# Altium PCB PCB1.PcbDoc
Units mm, origin at the board's own origin, x right, y up, seen from the top; angles counter-clockwise.
Board outline 51.56 x 39.8 mm, 2 copper layers (Top Layer, Bottom Layer); 26 components, 16 nets, 89 pads, 12 vias.
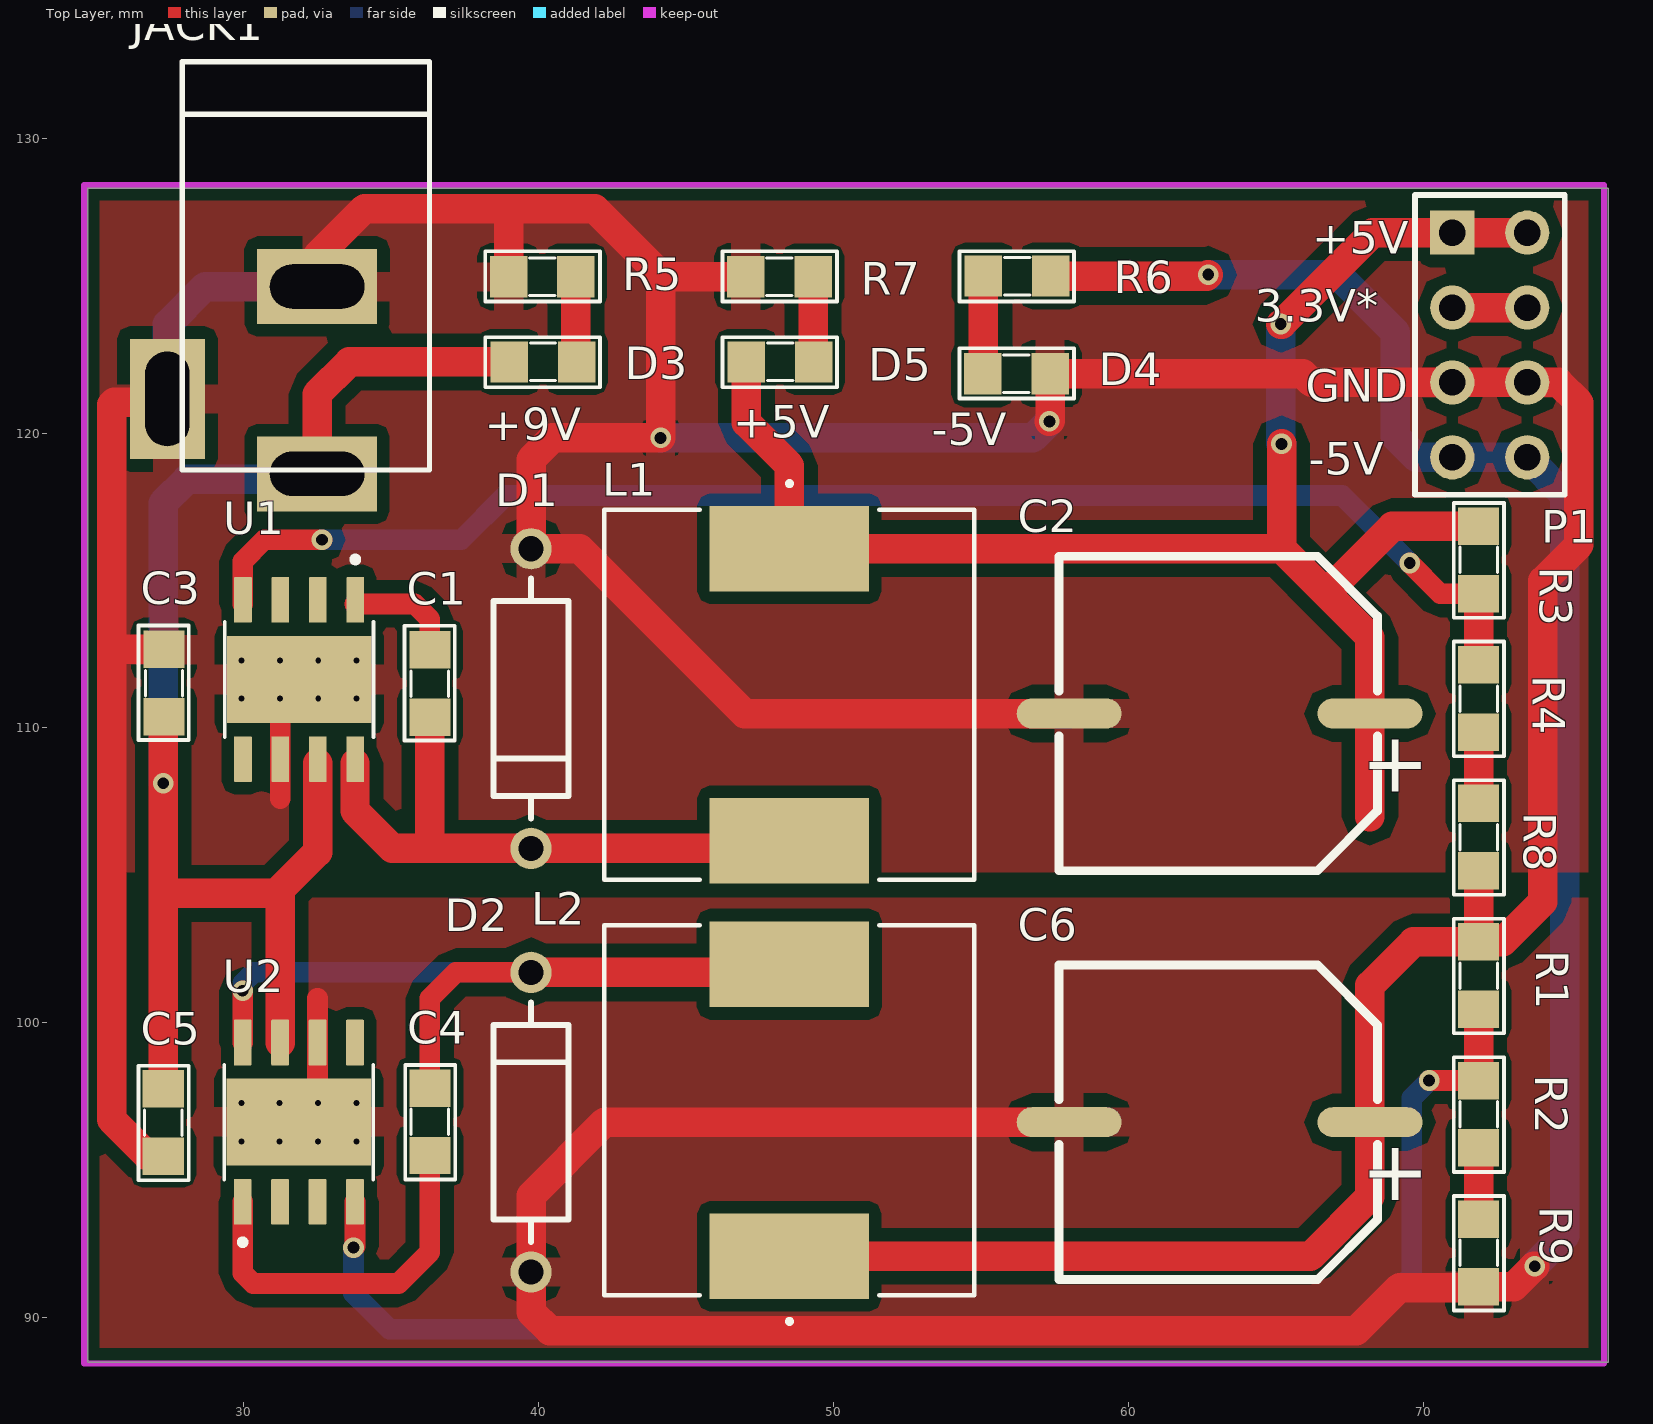
[diagram p0: Top Layer view]
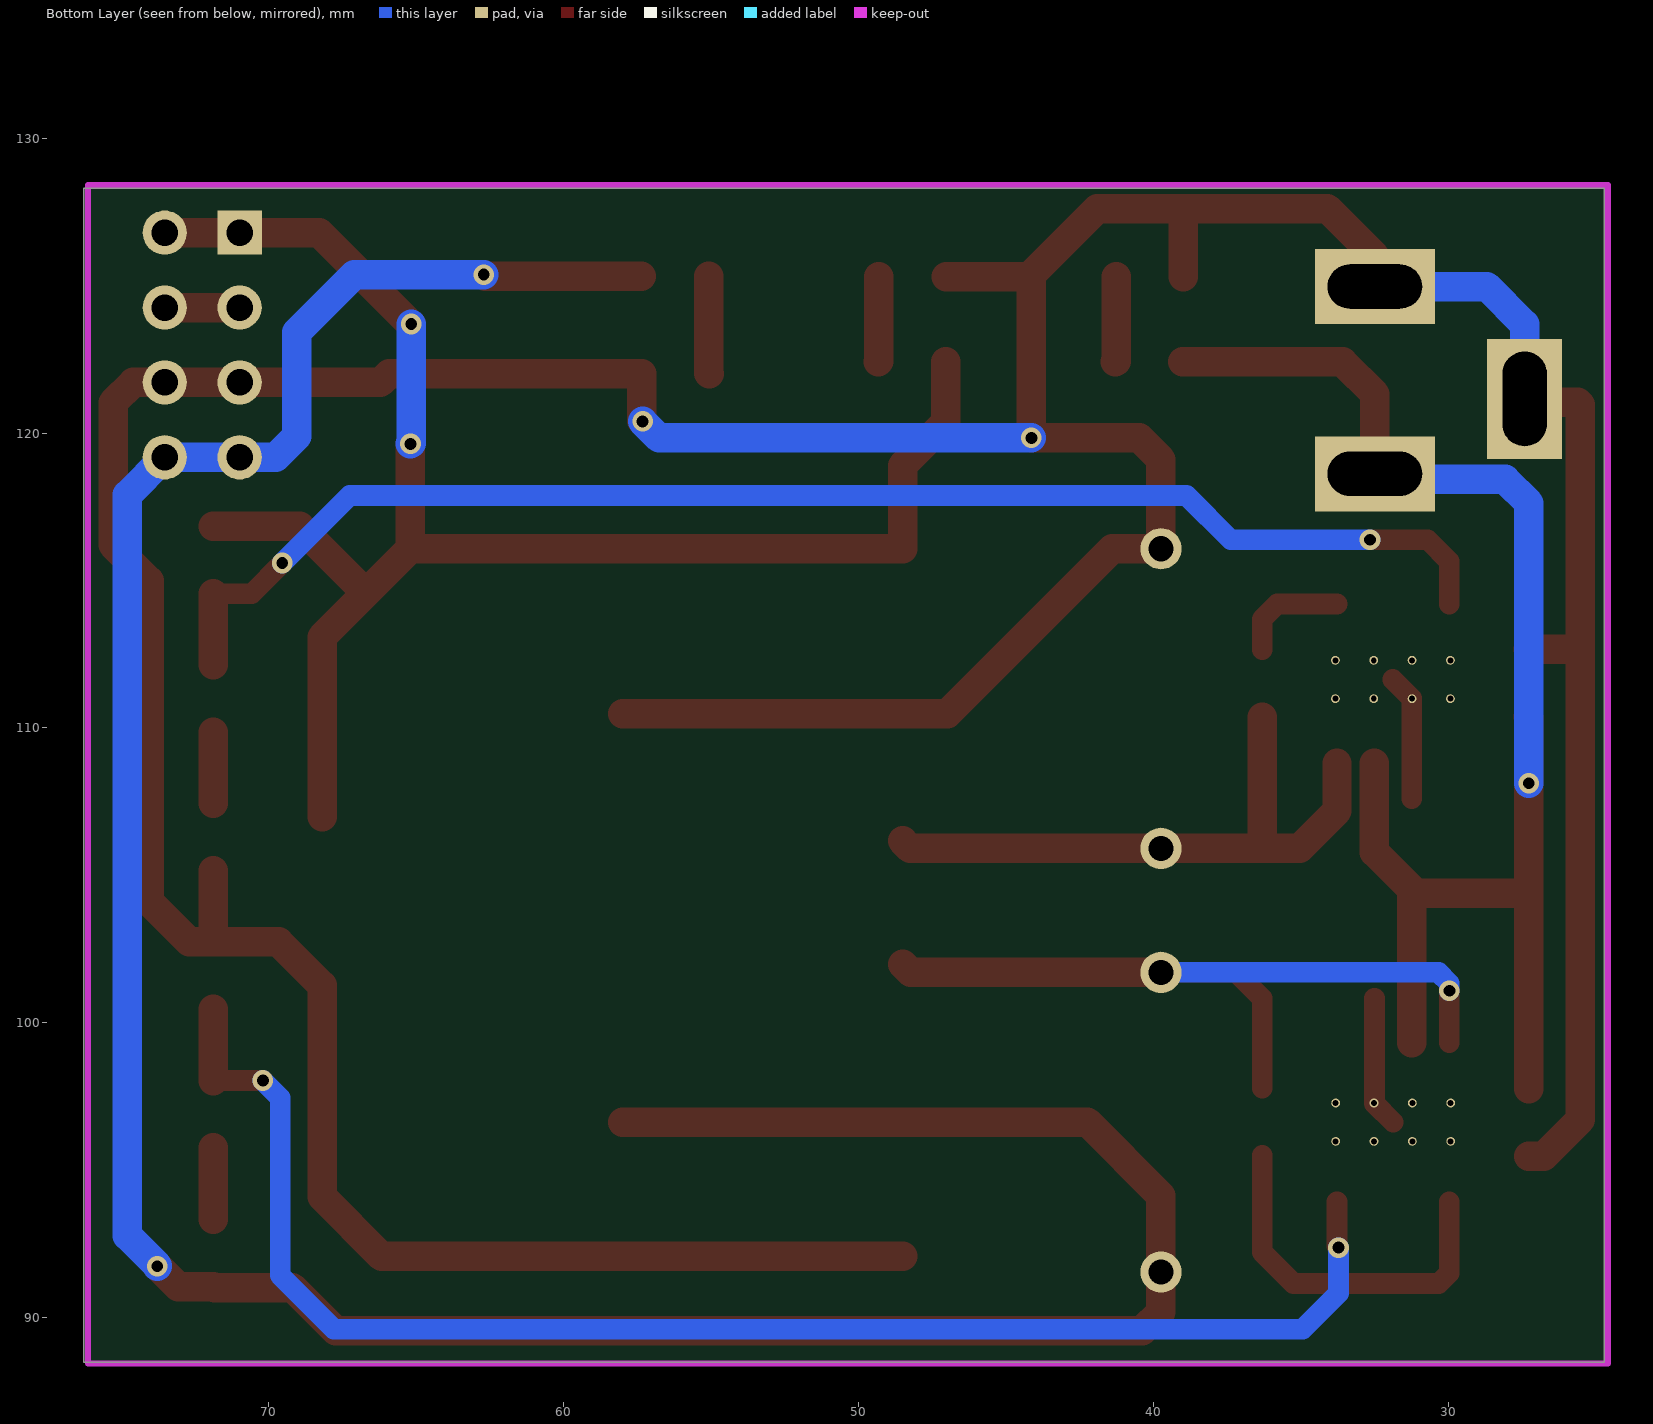
[diagram p1: Bottom Layer view, seen from below]
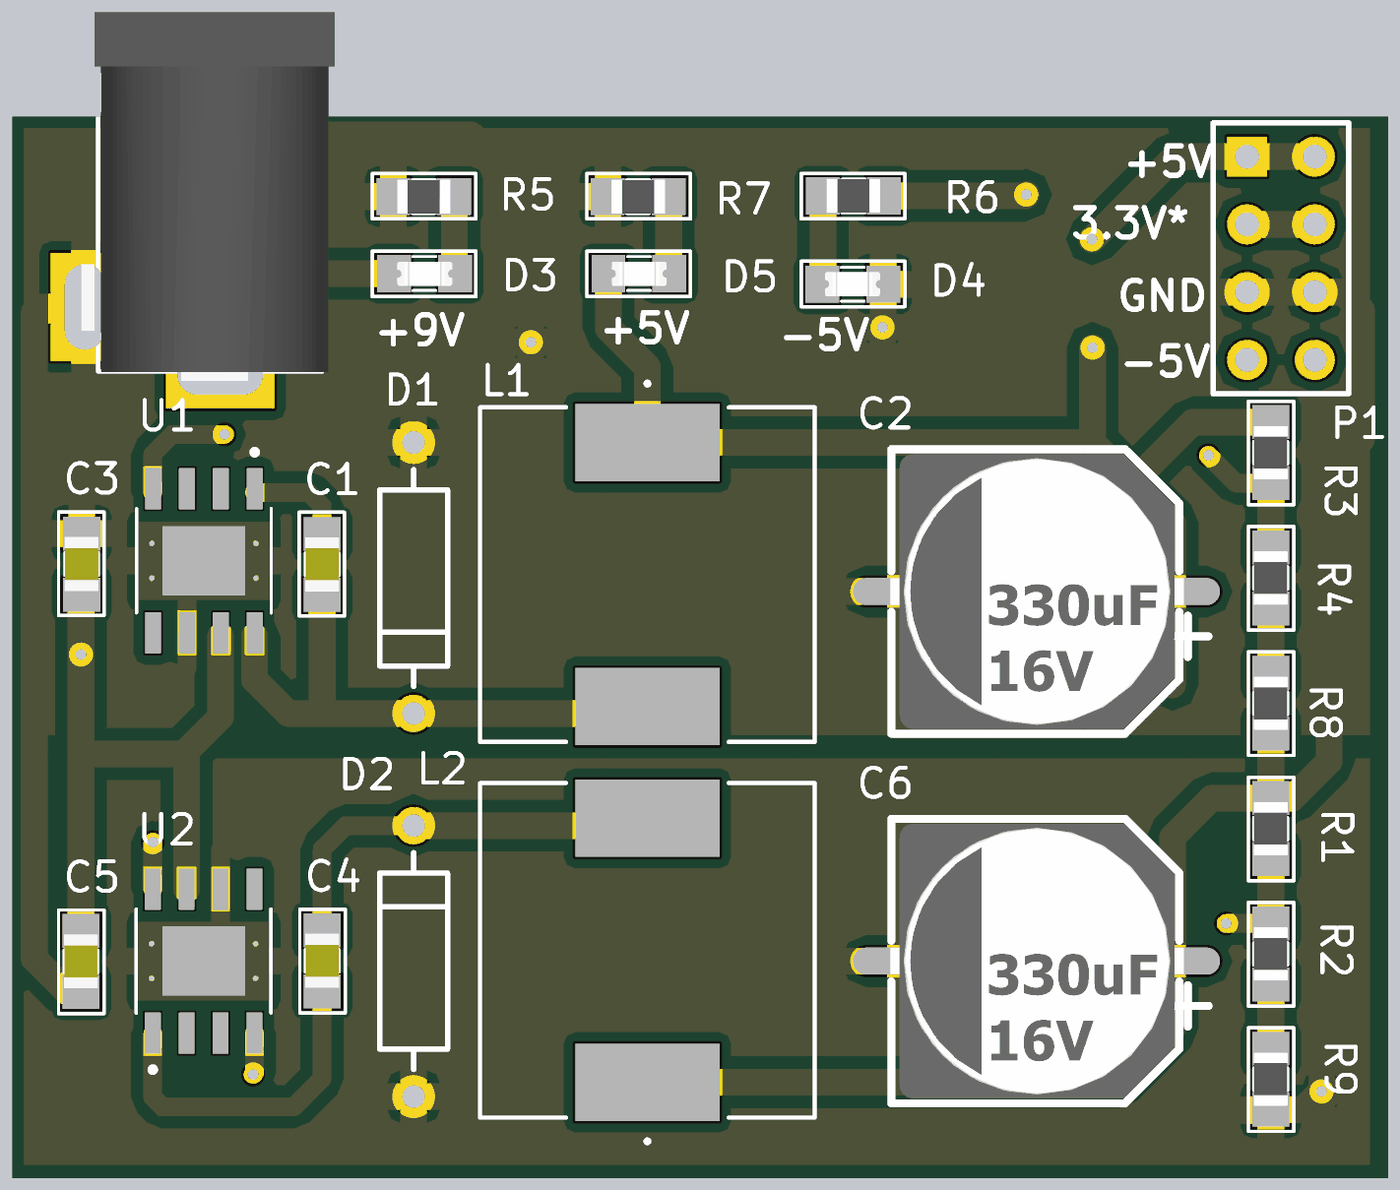
[diagram p2: 3D render of the assembled board from above, using the file's embedded part models]

## Layer stack, top to bottom
Top Solder: solder mask 0.0102, Solder Resist, Dk 3.5
Top Layer: signal copper 0.0356
Dielectric 1: dielectric 0.32, FR-4, Dk 4.8
Bottom Layer: signal copper 0.0356
Bottom Solder: solder mask 0.0102, Solder Resist, Dk 3.5

## Board outline
24.714,88.494 76.276,88.494 76.276,128.295 24.714,128.295

## Design rules (kind name [scope] priority, off if disabled: settings)
Clearance Clearance_2 [InNamedPolygon('GND_L01_P004')] p1: gap=0.4 ignorepadtopadclearanceinfootprint=FALSE except(0: Arc-Hole Track-Hole SMDPad-Hole THPad-Hole Via-Hole Fill-Hole Poly-Hole Region-Hole Text-Hole)
Clearance Clearance_1 [InNamedPolygon('-5V_L01_P002')] p2: gap=0.4 ignorepadtopadclearanceinfootprint=FALSE except(0: Arc-Hole Track-Hole SMDPad-Hole THPad-Hole Via-Hole Fill-Hole Poly-Hole Region-Hole Text-Hole)
Clearance [All] p3: gap=0.2 ignorepadtopadclearanceinfootprint=TRUE
PolygonConnect PolygonConnect_10 [All vs IsNamedPolygon('-5V_L01_P002')] p1: connectstyle=Relief reliefconductorwidth=1 reliefentries=4 polygonreliefangle="90 Angle" airgapwidth=0.4
PolygonConnect PolygonConnect_9 [All vs IsNamedPolygon('GND_L01_P004')] p2: connectstyle=Relief reliefconductorwidth=1 reliefentries=4 polygonreliefangle="90 Angle" airgapwidth=0.4
PolygonConnect PolygonConnect_8 [All vs IsNamedPolygon('-5V_L01_P002')] p3: connectstyle=Relief reliefconductorwidth=1 reliefentries=4 polygonreliefangle="90 Angle" airgapwidth=0.4
PolygonConnect PolygonConnect_7 [All vs IsNamedPolygon('GND_L01_P004')] p4: connectstyle=Relief reliefconductorwidth=1 reliefentries=4 polygonreliefangle="90 Angle" airgapwidth=0.4
PolygonConnect PolygonConnect_6 [All vs IsNamedPolygon('GND_L01_P004')] p5: connectstyle=Relief reliefconductorwidth=1 reliefentries=4 polygonreliefangle="90 Angle" airgapwidth=0.254
PolygonConnect PolygonConnect_5 [All vs IsNamedPolygon('-5V_L01_P002')] p6: connectstyle=Direct reliefconductorwidth=0.254 reliefentries=4 polygonreliefangle="90 Angle" airgapwidth=0.254
PolygonConnect PolygonConnect_4 [All vs IsNamedPolygon('GND_L01_P004')] p7: thpad.connectstyle=Relief thpad.reliefconductorwidth=1 thpad.reliefentries=4 thpad.polygonreliefangle="90 Angle" thpad.airgapwidth=0.254 smdpad.connectstyle=Relief smdpad.reliefconductorwidth=0.254 smdpad.reliefentries=4 smdpad.polygonreliefangle="90 Angle" smdpad.airgapwidth=0.254 via.connectstyle=Relief via.reliefconductorwidth=0.254 via.reliefentries=4 via.polygonreliefangle="90 Angle" via.airgapwidth=0.254
PolygonConnect PolygonConnect_3 [All vs IsNamedPolygon('-5V_L01_P002')] p8: thpad.connectstyle=Relief thpad.reliefconductorwidth=1 thpad.reliefentries=4 thpad.polygonreliefangle="90 Angle" thpad.airgapwidth=0.254 smdpad.connectstyle=Relief smdpad.reliefconductorwidth=0.254 smdpad.reliefentries=4 smdpad.polygonreliefangle="90 Angle" smdpad.airgapwidth=0.254 via.connectstyle=Relief via.reliefconductorwidth=0.254 via.reliefentries=4 via.polygonreliefangle="90 Angle" via.airgapwidth=0.254
PolygonConnect PolygonConnect_2 [All vs IsNamedPolygon('GND_L01_P004')] p9: thpad.connectstyle=Direct thpad.reliefconductorwidth=0.254 thpad.reliefentries=4 thpad.polygonreliefangle="90 Angle" thpad.airgapwidth=0.254 smdpad.connectstyle=Relief smdpad.reliefconductorwidth=0.254 smdpad.reliefentries=4 smdpad.polygonreliefangle="90 Angle" smdpad.airgapwidth=0.254 via.connectstyle=Relief via.reliefconductorwidth=0.254 via.reliefentries=4 via.polygonreliefangle="90 Angle" via.airgapwidth=0.254
PolygonConnect PolygonConnect_1 [All vs IsNamedPolygon('-5V_L01_P002')] p10: thpad.connectstyle=Direct thpad.reliefconductorwidth=1 thpad.reliefentries=4 thpad.polygonreliefangle="90 Angle" thpad.airgapwidth=0.254 smdpad.connectstyle=Relief smdpad.reliefconductorwidth=0.254 smdpad.reliefentries=4 smdpad.polygonreliefangle="90 Angle" smdpad.airgapwidth=0.254 via.connectstyle=Relief via.reliefconductorwidth=0.254 via.reliefentries=4 via.polygonreliefangle="90 Angle" via.airgapwidth=0.254
PolygonConnect [All] p11: connectstyle=Relief reliefconductorwidth=0.254 reliefentries=4 polygonreliefangle="90 Angle" airgapwidth=0.254
RoutingVias [All] p1: holewidth=0.4 width=0.7 viastyle="Through Hole" minholewidth=0.4 minwidth=0.7 maxholewidth=0.4 maxwidth=0.7
SolderMaskExpansion [All] p1: expansion=0.102
Width [All] p1: maxlimit=1 minlimit=0.254 preferedwidth=0.7
30 further rules are at their usual default settings.

## Components (designator, comment, footprint, x,y, rotation, side; value= is the part's Value field where it differs from the comment)
C1 "0.01uF" "0805 CAP" 36.322,111.506 r270 top
C2 "220uF" "CAP ALUMINUM SMD" 68.199,110.49 r180 top
C3 "4.7 uF" "0805 CAP" 27.305,111.519 r270 top
C4 "0.01uF" "0805 CAP" 36.322,96.645 r90 top
C5 "4.7 uF" "0805 CAP" 27.28,96.619 r90 top
C6 "220uF" "CAP ALUMINUM SMD" 68.199,96.632 r180 top
D1 "SR5100" DIODE-0.4 39.751,110.998 r270 top
D2 "SR5100" DIODE-0.4 39.751,96.632 r90 top
D3 "LED" "LED SMD 0805" 40.167,122.479 r0 top
D4 "LED" "LED SMD 0805" 56.2,121.945 r180 top
D5 "LED" "LED SMD 0805" 48.206,122.479 r0 top
JACK1 "JACK DC" "JACK DC" 29.959,121.793 r270 top value="Jac DC"
L1 "15uH CDRH127" IND_CDRH127/LDNP-470MC_SUM 48.514,111.125 r270 top
L2 "15uH CDRH127" IND_CDRH127/LDNP-470MC_SUM 48.514,97.038 r90 top
P1 "Header 4X2" HDR2X4 70.993,126.797 r270 top
R1 "10k" "0805 RESISTOR" 71.882,100.457 r90 top value="R1/4W - 1K"
R2 "3k" "0805 RESISTOR" 71.882,95.758 r90 top value="R1/4W - 1K"
R3 "10k" "0805 RESISTOR" 71.882,114.554 r90 top value="R1/4W - 1K"
R4 "3k" "0805 RESISTOR" 71.882,109.855 r90 top value="R1/4W - 1K"
R5 "10k" "0805 RESISTOR" 41.275,125.298 r180 top value="R1/4W - 1K"
R6 "10k" "0805 RESISTOR" 55.093,125.324 r0 top value="R1/4W - 1K"
R7 "10k" "0805 RESISTOR" 49.314,125.298 r180 top value="R1/4W - 1K"
R8 "240" "0805 RESISTOR" 71.882,105.156 r90 top value="R1/4W - 1K"
R9 "240" "0805 RESISTOR" 71.882,91.059 r90 top value="R1/4W - 1K"
U1 "TPS5430DDAR" CONV_TPS5430DDAR 31.887,111.643 r270 top
U2 "TPS5430DDAR" CONV_TPS5430DDAR 31.877,96.632 r90 top

## Footprints (in the part's own frame and the unit in brackets; to place one, negate y for a bottom-side part, rotate by r counter-clockwise, add the part's x,y. Pads: shape width x height; smd on the part's side, far side on the other; paste and mask are expansions set on the pad)
"0805 CAP" [mil] "Compoment SMD 80x50mil"
  rect 50x55 smd: 1(-45,0) 2(45,0)
  silkscreen extent -77,-34 76,33, body extent -40,-25 40,25, height 24
"0805 RESISTOR" [mil] "Compoment SMD 80x50mil"
  rect 50x55 smd: 1(0,0) 2(90,0)
  silkscreen extent -32,-34 121,33, body extent 6,-25 84,25, height 24
"CAP ALUMINUM SMD" [mil] "330-470uF"
  oval 140x40 smd: 1(0,0) 2(401.57,0)
  silkscreen extent -10,-210 415,210, body extent -17,-203 417,203, height 437
CONV_TPS5430DDAR [mm]
  rrect10% 1.55x0.6 smd mask+0: 1(-2.7,1.905) 2(-2.7,0.635) 3(-2.7,-0.635) 4(-2.7,-1.905) 5(2.7,-1.905) 6(2.7,-0.635) 7(2.7,0.635) 8(2.7,1.905)
  round 0.3 hole 0.2 mask+0: 9(-0.65,1.95) 9(-0.65,0.65) 9(-0.65,-0.65) 9(-0.65,-1.95) 9(0.65,1.95) 9(0.65,0.65) 9(0.65,-0.65) 9(0.65,-1.95)
  rect 2.95x4.9 smd paste-3 mask+0: 9(0,0)
  silkscreen extent -4.17,-2.52 1.95,2.52
DIODE-0.4 [mm] "Diode, Thru-Hole; 2 Leads; 0.4 in Pin Spacing"
  round 1.4 hole 0.85: 1(-5.08,0) 2(5.08,0)
  silkscreen extent -4.06,-1.27 4.06,1.27
HDR2X4 [mm] "Connector; Header; 4x2 Position"
  rect 1.5x1.5 hole 0.9: 1(0,0)
  round 1.5 hole 0.9: 2(0,2.54) 3(2.54,0) 4(2.54,2.54) 5(5.08,0) 6(5.08,2.54) 7(7.62,0) 8(7.62,2.54)
  silkscreen extent -1.27,-1.27 8.89,3.81
IND_CDRH127/LDNP-470MC_SUM [mil]
  rect 114x213 smd: 1(-195,0) 2(195,0)
  silkscreen extent -285,-247 247,247
"JACK DC" [mm] "Jac DC input"
  rect 2.54x4.064 hole 1.5 slot 3.2 at 90 deg: 1(3.175,2.54) 2(-3.175,2.54)
  rect 4.064x2.54 hole 1.5 slot 3.2 at 0 deg: 3(0.635,-2.54)
  silkscreen extent -10.8,-2.03 3.05,6.35, body extent -10.42,-2.67 3.4,6.84, height 11.02
"LED SMD 0805" [mil] "Compoment SMD 80x50mil"
  rect 50x55 smd: 1(-45.39,-2.58) 2(44.61,-2.58)
  silkscreen extent -77,-37 76,30, body extent -41,-21 41,15, height 33

## Part data
C1 C3 C4 C5: library part "CAP CERAMIC", LatestRevisionDate=17-Jul-2002, LatestRevisionNote="Re-released for DXP Platform.", PackageReference=RAD-0.3, Published=8-Jun-2000, Publisher="Altium Limited"
C2 C6: library part CAPACITOR
D1 D2: library part "D Zener", "Zener Diode", LatestRevisionDate=17-Jul-2002, LatestRevisionNote="Re-released for DXP Platform.", PackageDescription="Diode, Thru-Hole; 2 Leads; 0.7 in Pin Spacing", PackageReference=DIODE-0.7, Published=8-Jun-2000, Publisher="Altium Limited"
L1 L2: library part CDRH127/LDNP-470MC, "47µH Shielded Inductor 3.25A 78mOhm Max Nonstandard", Package="Nonstandard Sumida", Check_prices=https://www.snapeda.com/parts/CDRH127/LDNP-470MC/Sumida%20America%20Components%20Inc./view-part/547921/?ref=eda, Digi-Key_Part_Number=308-1339-1-ND, MF="Sumida America", MP=CDRH127/LDNP-470MC, Purchase-URL=https://pricing.snapeda.com/search/part/CDRH127/LDNP-470MC/?ref=eda, SnapEDA_Link=https://www.snapeda.com/parts/CDRH127/LDNP-470MC/Sumida%20America%20Components%20Inc./view-part/547921/?ref=snap
R1 R2 R3 R4 R5 R6 R7 R8 R9: library part RESISTOR
U1 U2: "5.5V to 36V Input, 3A, 500kHz Step-Down Converter 8-SO PowerPAD -40 to 125", Package="HSOIC-8 Texas Instruments", Arrow_Electronics-Purchase-URL=https://snapeda.com/shop?store=Arrow+Electronics&id=423058, Digi-Key_Part_Number=296-26988-1-ND, DigiKey-Purchase-URL=https://snapeda.com/shop?store=DigiKey&id=423058, MF="Texas Instruments", Mouser-Purchase-URL=https://snapeda.com/shop?store=Mouser&id=423058, MP=TPS5430DDAR, SnapEDA_Link=https://www.snapeda.com/parts/TPS5430DDAR/Texas%20Instruments/view-part/423058/?ref=snap, Texas_Instruments-Purchase-URL=https://snapeda.com/shop?store=Texas+Instruments&id=423058
P1: LatestRevisionDate=17-Jul-2002, LatestRevisionNote="Re-released for DXP Platform.", Publisher="Altium Limited"

## Via types
v1: diameter 0.7, hole 0.4, Top Layer to Bottom Layer, 12 vias

## Nets (pads, with @x,y where several pads share a name; then routed paths per layer and width w, separated by ;. In a path a pad name is that pad's centre, name@x,y a point inside that pad or via, vN(x,y) a via of type N, cw(c..) or ccw(c..) an arc to the next point about the centre after c; other vN are vias at no path point)
3.3V: P1.3 P1.4 | length 2.5
  Top Layer w1: P1.3 P1.4
+5V: C2.1 D5.1 L1.1 P1.1 P1.2 R3.2 | length 57.4
  Top Layer w1: D5.1 47.053,120.358 48.514,118.897 L1.1 65.202,116.078 ; v1(65.176,123.698) 65.202,123.698 68.301,126.797 P1.1 P1.2 ; v1(65.202,119.634) 65.202,116.078 ; 68.199,106.985 C2.1 68.199,113.081 66.7,114.579 ; R3.2 68.961,116.84 66.7,114.579 ; 65.202,116.078 66.7,114.579
  Bottom Layer w1: v1(65.176,123.698) 65.176,119.659 v1(65.202,119.634)
+9V: C3.2 C5.2 D3.1 JACK1.1 U1.7 U2.7 | length 51.6
  Top Layer w1: C5.2 27.28,104.292 ; C3.2 27.28,110.35 v1(27.28,108.128) 27.28,104.292 ; U2.7 31.242,104.521 ; JACK1.1 32.499,121.323 33.59,122.413 D3.1 ; U1.7@32.512,108.806 32.512,105.791 31.242,104.521 ; 27.28,104.292 27.381,104.394 31.115,104.394 31.242,104.521
  Bottom Layer w1: v1(27.28,108.128) 27.28,117.627 28.078,118.426 32.499,118.426 JACK1.1
-5V: C6.2 D2.1 P1.7 P1.8 R6.2 R9.1 U2.6 U2.9 | length 112
  Top Layer w0.7: U2.9@31.877,96.632 32.512,97.267 U2.6 32.512,100.838
  Top Layer w1: R6.2 62.662,125.324 v1(62.713,125.374) ; C6.2 42.251,96.632 39.751,94.132 D2.1 39.751,90.195 40.386,89.56 67.742,89.56 69.202,91.021 R9.1@71.844,91.021 ; R9.1 73.076,91.059 73.762,91.745 v1(73.787,91.745)
  Bottom Layer w1: v1(62.713,125.374) 67.107,125.374 69.063,123.419 69.063,119.888 69.774,119.177 P1.7 P1.8 74.803,117.907 74.803,92.786 73.787,91.77 v1(73.787,91.745)
GND: C2.2 C3.1 C5.1 C6.1 D1.1 D4.1 JACK1.2 JACK1.3 L2.1 P1.5 P1.6 R1.2 R5.2 R7.2 R8.1 U1.6 U1.9 | length 183.8
  Top Layer w0.7: 31.252,107.605 U1.6 31.252,111.008 U1.9@31.887,111.643
  Top Layer w1: 25.995,112.662 C3.1 ; C5.1 26.774,95.476 25.527,96.723 25.527,120.955 25.616,121.044 JACK1.3@27.305,121.044 ; JACK1.2@32.829,125.298 JACK1.2 32.499,125.997 34.112,127.61 38.938,127.61 ; R5.2 38.989,127.559 38.938,127.61 ; 44.247,125.273 41.91,127.61 38.938,127.61 ; R7.2 44.272,125.298 44.145,125.171 v1(44.145,119.837) 40.488,119.837 39.751,119.101 D1.1 41.402,116.078 46.99,110.49 C2.2 ; L2.1 66.177,92.085 68.199,94.107 C6.1 68.199,101.27 69.672,102.743 R1.2 ; v1(57.328,120.396) 57.353,120.421 D4.1 65.924,122.011 66.218,121.717 P1.5 P1.6 74.6,121.717 75.286,121.031 75.286,116.205 74.066,114.986 74.066,104.115 72.695,102.743 R1.2 ; R8.1 R1.2
  Bottom Layer w1: JACK1.3 27.419,123.685 28.702,124.968 JACK1.2 ; v1(44.145,119.837) 56.769,119.837 v1(57.328,120.396)
NetC1_1: C1.1 U1.1 | length 3.8
  Top Layer w0.7: U1.1@33.782,114.206 35.806,114.206 36.322,113.69 C1.1
NetC1_2: C1.2 D1.2 L1.2 U1.8 | length 21.4
  Top Layer w1: U1.8@33.782,108.806 33.782,107.188 35.052,105.918 36.322,105.918 ; C1.2 36.322,105.918 ; L1.2 48.26,105.918 D1.2 36.322,105.918
NetC4_1: C4.1 U2.1 | length 12.6
  Top Layer w0.7: U2.1 29.972,91.516 30.328,91.161 35.255,91.161 36.322,92.227 C4.1
NetC4_2: C4.2 D2.2 L2.2 U2.8 | length 27.7
  Top Layer w0.7: U2.8 v1(29.972,101.092) ; C4.2 36.322,100.838 37.196,101.712 D2.2
  Top Layer w1: D2.2 48.235,101.712 L2.2
  Bottom Layer w0.7: v1(29.972,101.092) 29.972,101.346 30.338,101.712 D2.2
NetD3_2: D3.2 R5.1 | length 2.9
  Top Layer w1: R5.1 41.275,122.439 D3.2
NetD4_2: D4.2 R6.1 | length 3.3
  Top Layer w1: D4.2 55.093,122.036 R6.1
NetD5_2: D5.2 R7.1 | length 2.9
  Top Layer w1: R7.1 49.314,122.439 D5.2
NetR1_1: R1.1 R2.2 U2.4 | length 51.2
  Top Layer w0.7: v1(33.731,92.38) 33.782,92.431 U2.4 ; v1(70.206,98.044) R2.2
  Top Layer w1: R2.2 R1.1
  Bottom Layer w0.7: v1(33.731,92.38) 33.731,90.83 34.95,89.611 67.793,89.611 69.621,91.44 69.621,97.46 v1(70.206,98.044)
NetR2_1: R2.1 R9.2 | length 2.4
  Top Layer w1: R9.2 R2.1
NetR3_1: R3.1 R4.2 U1.4 | length 48.1
  Top Layer w0.7: U1.4@29.972,114.206 29.972,115.646 30.709,116.383 v1(32.664,116.383) ; v1(69.545,115.595) 70.587,114.554 R3.1
  Top Layer w1: R4.2 R3.1
  Bottom Layer w0.7: v1(32.664,116.383) 37.389,116.383 38.887,117.881 67.259,117.881 v1(69.545,115.595)
NetR4_1: R4.1 R8.2 | length 2.4
  Top Layer w1: R8.2 R4.1
pads on no net: U1.2 U1.3 U1.5 U2.2 U2.3 U2.5

## Polygon pours and split planes (outlines as drawn)
GND on Top Layer "GND_L01_P004" (solid, remove dead copper, pour order 4): 24.638,128.321 24.638,105.105 76.048,105.105 76.048,128.27 24.689,128.27
-5V on Top Layer "-5V_L01_P002" (solid, remove dead copper, pour order 2): 24.689,104.242 75.997,104.242 75.997,88.519 76.048,88.468 24.689,88.468

## Keep-outs
Keep-Out Layer:
  lines w0.2: 24.587,88.443 76.135,88.443 76.135,128.416 24.587,128.416 24.587,88.443

## Silkscreen, mask and mechanical layers (free items; w line width, h text height)
Top Overlay:
  text "+5V" at 66.243,126.086 h1.1
  text "3.3V*" at 64.287,123.774 h1.1
  text "GND" at 66.015,121.056 h1.1
  text "+5V" at 46.609,119.837 h1.1
  text "+9V" at 38.176,119.761 h1.1
  text "-5V" at 53.34,119.583 h1.1
  text "-5V" at 66.116,118.593 h1.1

## Text inside footprints (layer, text, board x,y; h text height)
C2: Top Overlay "+" at 70.231,109.601 h2.03 r180
C6: Top Overlay "+" at 70.231,95.743 h2.03 r180